# EAGLE board Accident Prevention and Detection (EAGLE 7.6.0)

Size 73.58 x 63.39 mm. Coordinates in mm from the lower left corner, seen from the top.
Outline: 0,0 56.82,0 56.82,53.33 0,53.33 0,0
Copper layers (1*16): Top 0.035mm / dielectric 1.5mm / Bottom 0.035mm
Design rules "default": minimum track width 10mil, minimum drill 24mil, track to track 8mil, track to pad 8mil, pad to pad 8mil, via to via 8mil, smd to smd 8mil, copper to edge 40mil, drill to drill 8mil, minimum pad ring 10mil, minimum via ring 8mil, stop-mask expansion 4mil, vias tented up to drill 0mil, thermal gap 10mil

## Footprints (pad centres in the part's own frame; a part is rotated, then mirrored left to right if it is on the bottom)
LED5MM = drill 0.813 octagon: A -1.27,0; K 1.27,0
LED-RGB-THRU = drill 0.762 pad 0.889 long: 1 1.905,0; 2 0.635,0; 3 -0.635,0; 4 -1.905,0
SNR6-D19.0MM = drill 1.3 pad 2: 1 -3.355,3.355; 2 -3.355,-3.355; 3 3.355,3.355; 4 3.355,-3.355; 5 0,4.75; 6 0,-4.75
PIEZO-22MM = drill 1 pad 2.54: P$1 -5,0; P$2 5,0
1X3P-2.54-2.54-11.6-3.0-BLACK-MALE = drill 0.889 pad 1.651 square: 1 0,2.54 | drill 0.889 pad 1.651: 2 0,0; 3 0,-2.54
0207/10 = drill 0.813 octagon: 1 -5.08,0; 2 5.08,0
SW2-12.7-12.0X3.6X3.6MM = drill 0.8 square: 1 6.35,0 | drill 0.8: 2 -6.35,0
ARDUINO_UNO = drill 1.016 pad 1.88: 0 63.5,50.8; 1 60.96,50.8; 2 58.42,50.8; 3 55.88,50.8; 3.3V 35.56,2.54; 4 53.34,50.8; 5 50.8,50.8; 5V 38.1,2.54; 6 48.26,50.8; 7 45.72,50.8; 8 41.656,50.8; 9 39.116,50.8; 10 36.576,50.8; 11 34.036,50.8; 12 31.496,50.8; 13 28.956,50.8; A0 50.8,2.54; A1 53.34,2.54; A2 55.88,2.54; A3 58.42,2.54; A4 60.96,2.54; A5 63.5,2.54; AREF 23.876,50.8; GND 26.416,50.8; GND. 43.18,2.54; GND.. 40.64,2.54; I/OREF 30.48,2.54; N/C 27.94,2.54; RESET 33.02,2.54; SCL 18.796,50.8; SDA 21.336,50.8; VIN 45.72,2.54 | hole 3.2: 66.04,7.62; 66.04,35.56; 15.24,50.8; 13.97,2.54
TO92 = drill 0.813 octagon: 1 1.27,0; 2 0,1.905; 3 -1.27,0

## Placement (x,y rotation side)
D1  [LED5MM]  5,264.08 0 top  (outside the outline)
D2  [LED-RGB-THRU]  5,124.38 0 top  (outside the outline)
GAS1  [SNR6-D19.0MM]  5,86.28 0 top  (outside the outline)
PIEZO1  [PIEZO-22MM]  5,35.48 0 top
PIR1  [1X3P-2.54-2.54-11.6-3.0-BLACK-MALE]  5,22.78 0 top
R1  1k‎Ω  [0207/10]  5,48.18 0 top
R2  1k‎Ω  [0207/10]  5,137.08 0 top  (outside the outline)
R3  1k‎Ω  [0207/10]  5,149.78 0 top  (outside the outline)
R4  1k‎Ω  [0207/10]  5,162.48 0 top  (outside the outline)
R5  22k‎Ω  [0207/10]  5,98.98 0 top  (outside the outline)
R6  10k‎Ω  [0207/10]  5,213.28 0 top  (outside the outline)
R7  10k‎Ω  [0207/10]  5,225.98 0 top  (outside the outline)
R8  10k‎Ω  [0207/10]  5,238.68 0 top  (outside the outline)
R9  10k‎Ω  [0207/10]  5,251.38 0 top  (outside the outline)
R10  1k‎Ω  [0207/10]  5,276.78 0 top  (outside the outline)
SERVO1  [1X3P-2.54-2.54-11.6-3.0-BLACK-MALE]  5,60.88 0 top
TILTDOWN  [SW2-12.7-12.0X3.6X3.6MM]  5,200.58 0 top  (outside the outline)
TILTLEFT  [SW2-12.7-12.0X3.6X3.6MM]  5,111.68 0 top  (outside the outline)
TILTRIGHT  [SW2-12.7-12.0X3.6X3.6MM]  5,175.18 0 top  (outside the outline)
TILTUP  [SW2-12.7-12.0X3.6X3.6MM]  5,187.88 0 top  (outside the outline)
U1  [ARDUINO_UNO]  5,10.08 0 top
U3  [TO92]  5,73.58 0 top  (outside the outline)

## Library data of the parts
D1 D2 GAS1 PIEZO1 PIR1 R1-R10 SERVO1 TILTDOWN TILTLEFT TILTRIGHT TILTUP U1 U3 = AUTODESK_CIRCUITS_BREADBOARD

## Nets
N$1: R1.1
N$2: D2.3 R3.1
N$3: SERVO1.3 U1.9
N$4: PIR1.3 U1.7
N$5: PIEZO1.P$1 U1.6
N$6: U1.A0 U3.2
N$7: GAS1.2 GAS1.4 GAS1.6 PIR1.2 R1.2 R6.1 R7.1 R8.1 R9.1 SERVO1.2 U1.5V U3.3
N$8: GAS1.3 U1.A1
N$9: GAS1.1 R5.1
N$10: R8.2 TILTUP.1 U1.2
N$11: R6.2 TILTRIGHT.1 U1.3
N$12: R7.2 TILTLEFT.1 U1.4
N$13: R9.2 TILTDOWN.1 U1.1
N$14: D2.4 R4.1
N$15: D2.1 R2.1
N$16: R2.2 U1.8
N$17: R3.2 U1.10
N$18: R4.2 U1.11
N$19: R10.2 U1.5
N$20: D1.K D2.2 GAS1.5 PIEZO1.P$2 PIR1.1 R5.2 SERVO1.1 TILTDOWN.2 TILTLEFT.2 TILTRIGHT.2 TILTUP.2 U1.GND.. U3.1
N$21: D1.A R10.1

## Tracks (layer width: path | path; a pad name or v marks a point on that pad's centre or on a via)
N$2  (1 unrouted)
N$3  (1 unrouted)
N$4  (1 unrouted)
N$5  (1 unrouted)
N$6  (1 unrouted)
N$7  (11 unrouted)
N$8  (1 unrouted)
N$9  (1 unrouted)
N$10  (2 unrouted)
N$11  (2 unrouted)
N$12  (2 unrouted)
N$13  (2 unrouted)
N$14  (1 unrouted)
N$15  (1 unrouted)
N$16  (1 unrouted)
N$17  (1 unrouted)
N$18  (1 unrouted)
N$19  (1 unrouted)
N$20  (12 unrouted)
N$21  (1 unrouted)